# Altium PCB DCDC_4805.PcbDoc
Units mil, origin at the board's own origin, x right, y up, seen from the top; angles counter-clockwise.
Board outline 4000 x 2000 mil, 2 copper layers (Top Layer, Bottom Layer); 39 components, 10 nets, 102 pads, 11 vias.
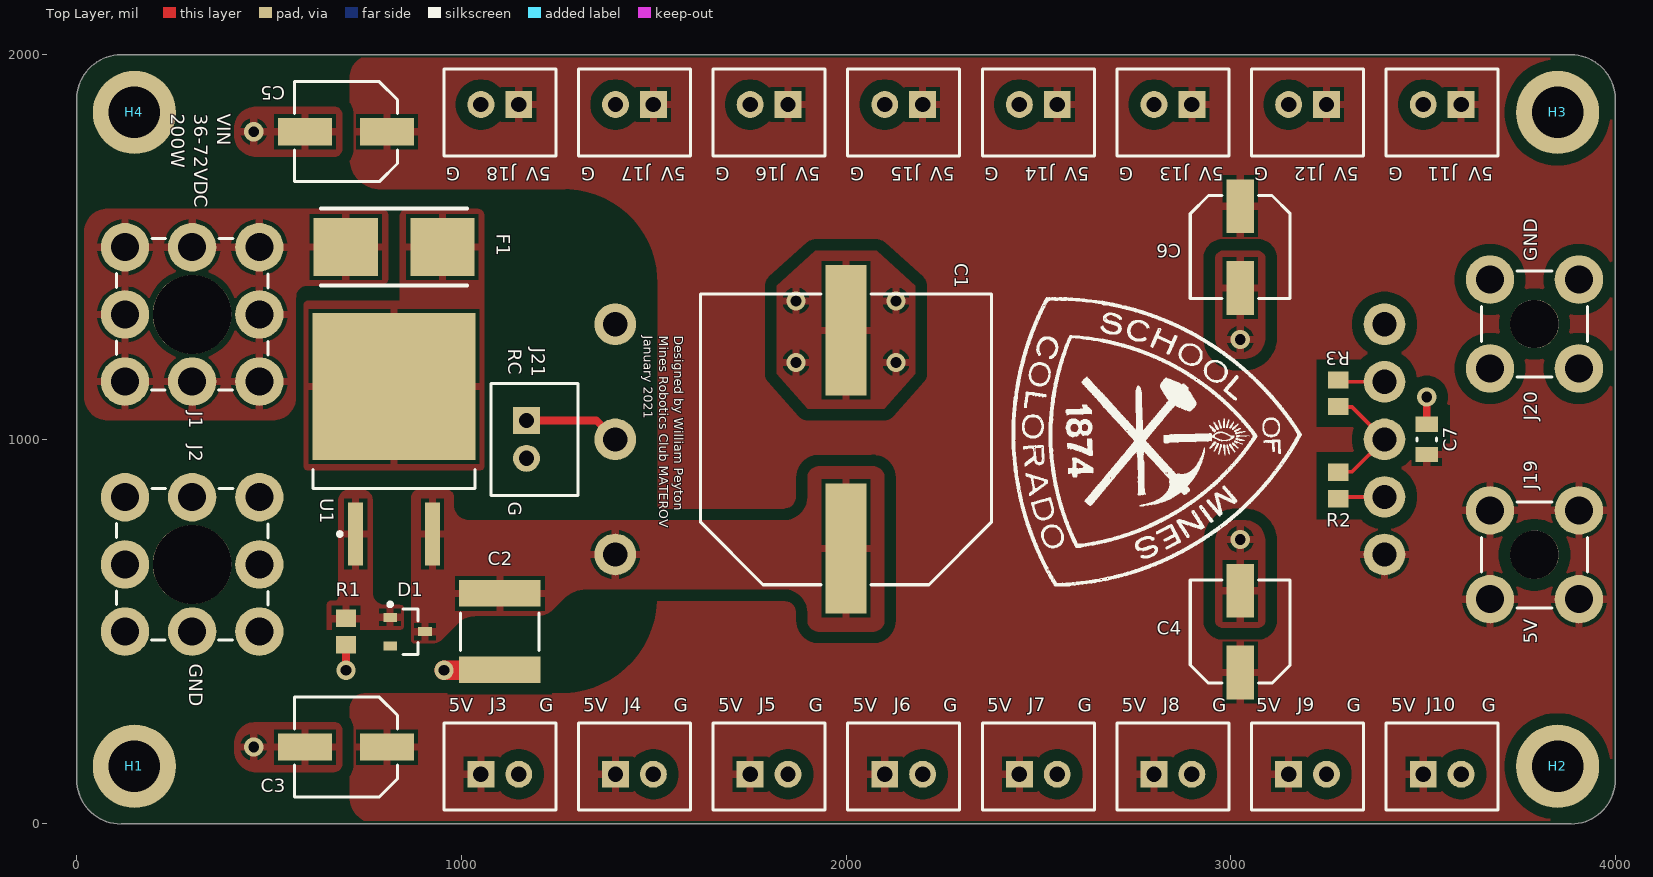
[diagram p0: Top Layer view]
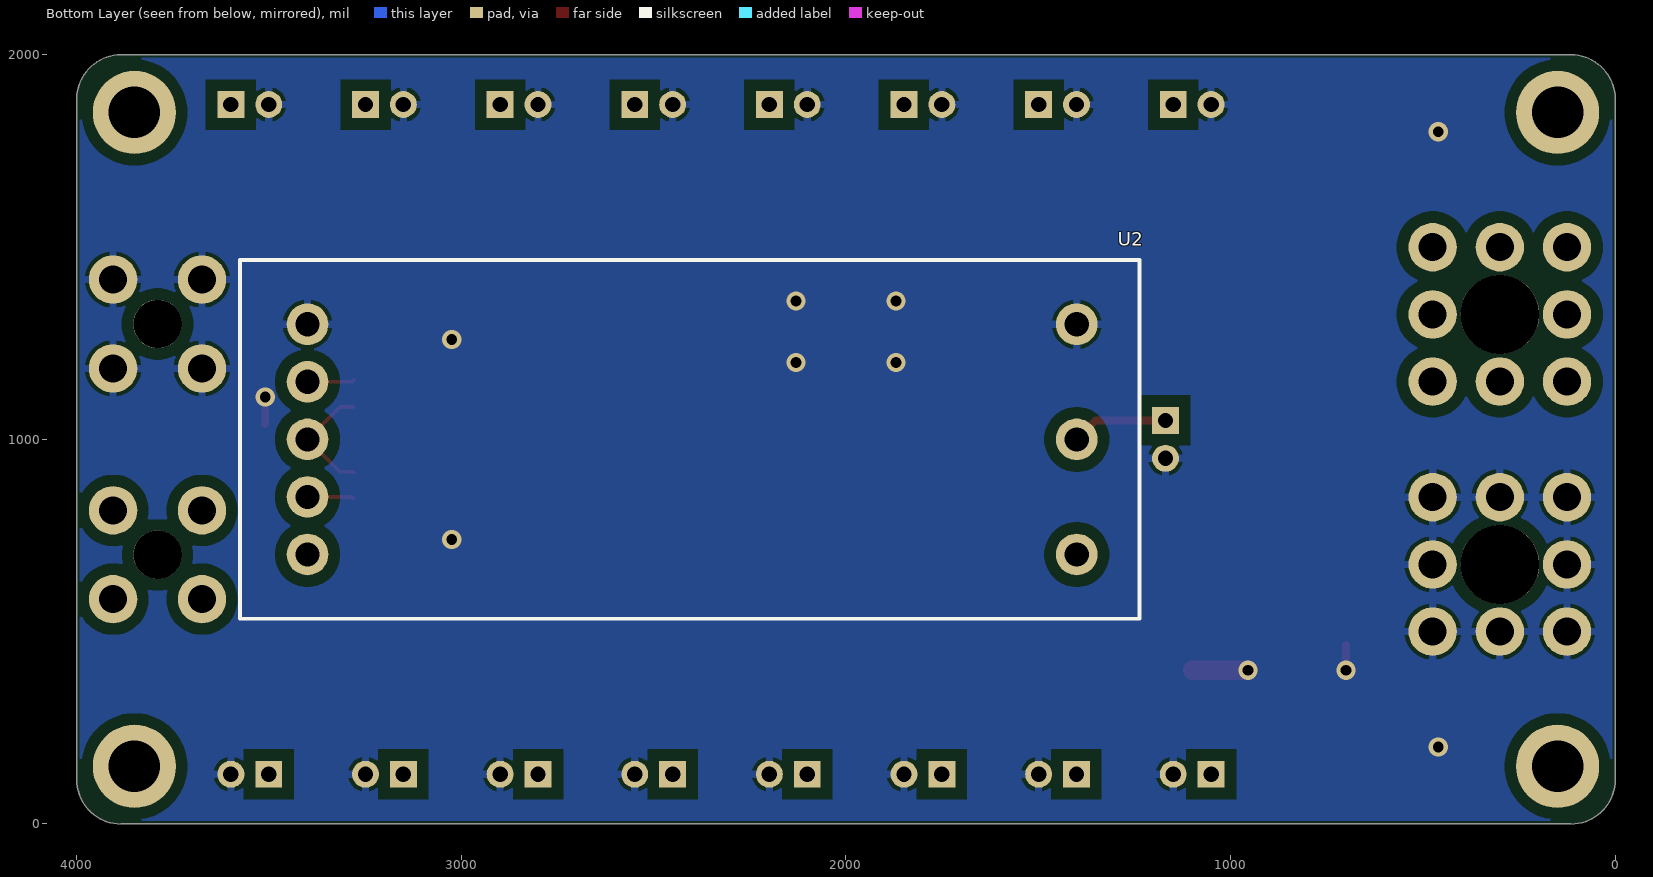
[diagram p1: Bottom Layer view, seen from below]
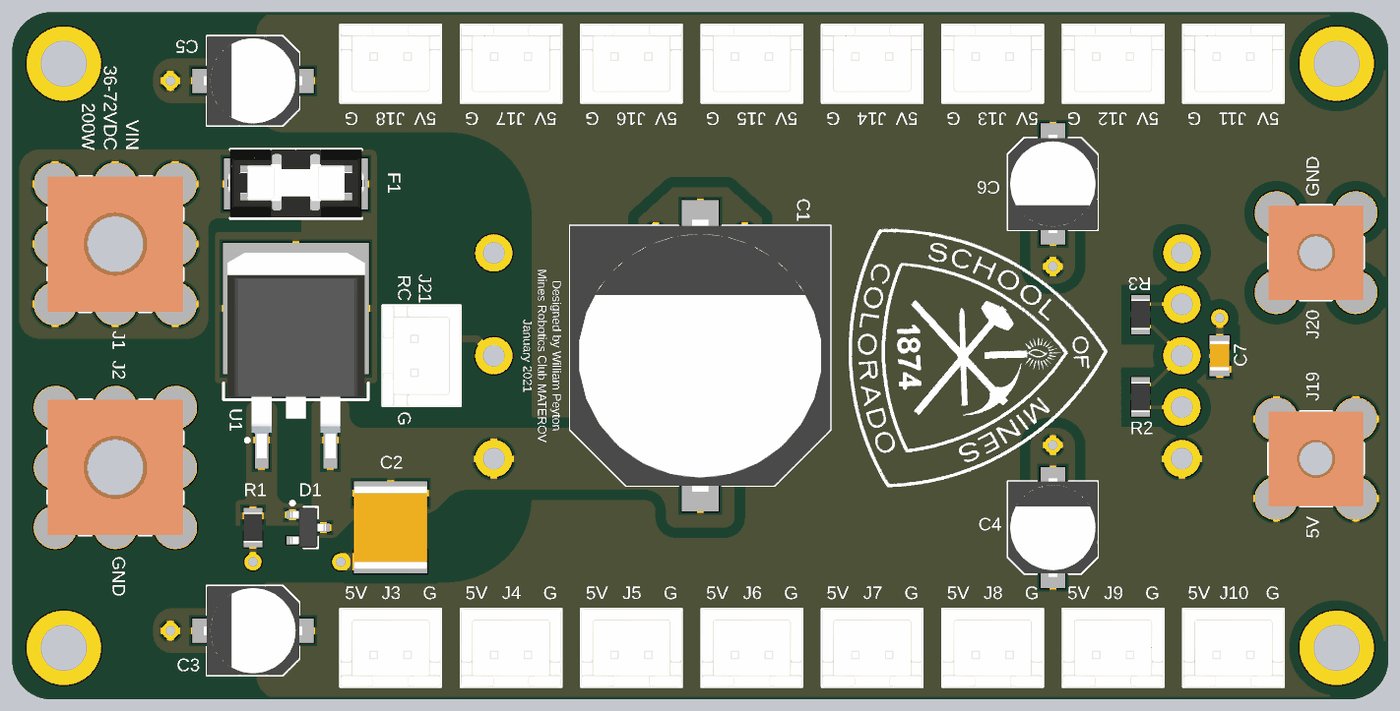
[diagram p2: 3D render of the assembled board from above, using the file's embedded part models]

## Layer stack, top to bottom
Top Solder: solder mask 0.4, Solder Resist, Dk 3.5
Top Layer: signal copper 1.4
Dielectric 1: dielectric 12.6, FR-4, Dk 4.8
Bottom Layer: signal copper 1.4
Bottom Solder: solder mask 0.4, Solder Resist, Dk 3.5

## Board outline
0,115 ccw(c115,115) 115,0 3885,0 ccw(c3885,115) 4000,115 4000,1885 ccw(c3885,1885) 3885,2000 115,2000 ccw(c115,1885) 0,1885

## Design rules (kind name [scope] priority, off if disabled: settings)
BoardOutlineClearance [All] p1: gap=7.87 ignorepadtopadclearanceinfootprint=FALSE except(15.75: Arc-SplitBarrior Arc-SplitContinuation Track-SplitBarrior Track-SplitContinuation SMDPad-SplitBarrior SMDPad-SplitContinuation THPad-SplitBarrior THPad-SplitContinuation Via-SplitBarrior Via-SplitContinuation Fill-SplitBarrior Fill-SplitContinuation Poly-SplitBarrior Poly-SplitContinuation Region-SplitBarrior Region-SplitContinuation Text-SplitBarrior Text-SplitContinuation)
Clearance Clearance_10 [InNamedPolygon('5V_PLANE') Or InNamedPolygon('GND')] p1: gap=30 ignorepadtopadclearanceinfootprint=FALSE
Clearance Clearance_9 [InNamedPolygon('5V_PLANE') Or InNamedPolygon('GND')] p2: gap=10 ignorepadtopadclearanceinfootprint=FALSE except(0: Arc-Hole Track-Hole SMDPad-Hole THPad-Hole Via-Hole Fill-Hole Poly-Hole Region-Hole Text-Hole)
Clearance "Clearance Bottom Layer" [OnLayer('Bottom Layer')] p3: gap=8 ignorepadtopadclearanceinfootprint=TRUE except(10: Arc-Text Track-Text SMDPad-Text THPad-Text Via-Text Fill-Text Poly-Text Region-Text Text-Text)
Clearance "Clearance Top Layer" [OnLayer('Top Layer')] p4: gap=8 ignorepadtopadclearanceinfootprint=TRUE except(10: Arc-Text Track-Text SMDPad-Text THPad-Text Via-Text Fill-Text Poly-Text Region-Text Text-Text)
Clearance Clearance_8 [InNamedPolygon('VIN')] p5: gap=30 ignorepadtopadclearanceinfootprint=FALSE
Clearance Clearance_7 [InNamedPolygon('FET_CLAMP')] p6: gap=15 ignorepadtopadclearanceinfootprint=FALSE
Clearance Clearance_6 [InNamedPolygon('VIN')] p7: gap=15 ignorepadtopadclearanceinfootprint=FALSE
Clearance Clearance_5 [InNamedPolygon('VIN')] p8: gap=10 ignorepadtopadclearanceinfootprint=FALSE except(0: Arc-Hole Track-Hole SMDPad-Hole THPad-Hole Via-Hole Fill-Hole Poly-Hole Region-Hole Text-Hole)
Clearance Clearance_4 [InNamedPolygon('FUSE_IN') Or InNamedPolygon('FUSE_OUT')] p9: gap=15 ignorepadtopadclearanceinfootprint=FALSE
Clearance Clearance_3 [All] p10: gap=25 ignorepadtopadclearanceinfootprint=FALSE
Clearance Clearance_2 [All] p11: gap=30 ignorepadtopadclearanceinfootprint=FALSE
Clearance Clearance_1 [InNamedPolygon('NONET_L-01_P-001')] p12: gap=20 ignorepadtopadclearanceinfootprint=FALSE
Clearance [All] p13: gap=7.87 ignorepadtopadclearanceinfootprint=FALSE except(3.5: Arc-Arc Arc-Track Arc-SMDPad Track-Track Track-SMDPad SMDPad-SMDPad; 5: Arc-Via Track-Via SMDPad-Via THPad-Via Via-Via; 10: Arc-Text Track-Text SMDPad-Text THPad-Text Via-Text Fill-Text Poly-Text Region-Text Text-Text)
HoleSize [All] p1: absolutevalues=TRUE maxlimit=248.03 minlimit=7.87 maxpercent=80.000 minpercent=20.000
MinimumAnnularRing [All] p1: minimumring=3
MinimumSolderMaskSliver [All] p1: minsoldermaskwidth=3.94
PolygonConnect PolygonConnect_1 [All] p1: thpad.connectstyle=Relief thpad.reliefconductorwidth=20 thpad.reliefentries=4 thpad.polygonreliefangle="90 Angle" thpad.airgapwidth=10 smdpad.connectstyle=Relief smdpad.reliefconductorwidth=20 smdpad.reliefentries=4 smdpad.polygonreliefangle="90 Angle" smdpad.airgapwidth=10 via.connectstyle=Direct via.reliefconductorwidth=20 via.reliefentries=4 via.polygonreliefangle="90 Angle" via.airgapwidth=10
PolygonConnect [All] p2: connectstyle=Relief reliefconductorwidth=10 reliefentries=4 polygonreliefangle="90 Angle" airgapwidth=10
RoutingCorners [All] p1: cornerstyle=Round minsetback=100 maxsetback=100
RoutingVias [All] p1: holewidth=19.68 width=39.37 viastyle="Through Hole" minholewidth=7.87 minwidth=17.72 maxholewidth=39.37 maxwidth=78.74
SilkToSilkClearance [All] p1: silktosilkclearance=3.94
SilkToSolderMaskClearance [IsPad] p1: minsilkscreentomaskgap=3.94 clearancetoexposedcopper=TRUE
SolderMaskExpansion [All] p1: expansion=4 istentingtop=FALSE
Width [All] p1: maxlimit=100 minlimit=3.5 preferedwidth=15
25 further rules are at their usual default settings.

## Components (designator, comment, footprint, x,y, rotation, side; value= is the part's Value field where it differs from the comment)
C1 "330uF 100V" EEV-FK2A331M 2000,1000 r90 top
C2 "15uF 100V" "C2220M Generic" 1100,500 r90 top
C3 "100uF 10V" 865080243007 700,200 r180 top
C4 "100uF 10V" 865080243007 3025,500 r90 top
C5 "100uF 10V" 865080243007 700,1800 r180 top
C6 "100uF 10V" 865080243007 3025,1500 r270 top
C7 "22uF 10V" 885012107011 3510,1000 r90 top
D1 "12V 250mW" BZX84-C12,235 860,500 r0 top
F1 "125VDC 5A" 0154005.DRL 825,1500 r0 top
H1 "M3" M3_MOUNTING_HOLE#1 1015,55 r0 top
H2 "M3" M3_MOUNTING_HOLE#2 3785,90 r0 top
H3 "M3" M3_MOUNTING_HOLE#3 3750,1850 r0 top
H4 "M3" M3_MOUNTING_HOLE#4 970,1850 r0 top
J1 "M5x3.5mm" 74655095 300,1325 r0 top
J2 "M5x3.5mm" 74655095 300,675 r0 top
J3 "JST-XH 2POS VERT" FP-B2B-XH-A_LF_SN-MFG 1100,150 r0 top
J4 "JST-XH 2POS VERT" FP-B2B-XH-A_LF_SN-MFG 1450,150 r0 top
J5 "JST-XH 2POS VERT" FP-B2B-XH-A_LF_SN-MFG 1800,150 r0 top
J6 "JST-XH 2POS VERT" FP-B2B-XH-A_LF_SN-MFG 2150,150 r0 top
J7 "JST-XH 2POS VERT" FP-B2B-XH-A_LF_SN-MFG 2500,150 r0 top
J8 "JST-XH 2POS VERT" FP-B2B-XH-A_LF_SN-MFG 2850,150 r0 top
J9 "JST-XH 2POS VERT" FP-B2B-XH-A_LF_SN-MFG 3200,150 r0 top
J10 "JST-XH 2POS VERT" FP-B2B-XH-A_LF_SN-MFG 3550,150 r0 top
J11 "JST-XH 2POS VERT" FP-B2B-XH-A_LF_SN-MFG 3550,1850 r180 top
J12 "JST-XH 2POS VERT" FP-B2B-XH-A_LF_SN-MFG 3200,1850 r180 top
J13 "JST-XH 2POS VERT" FP-B2B-XH-A_LF_SN-MFG 2850,1850 r180 top
J14 "JST-XH 2POS VERT" FP-B2B-XH-A_LF_SN-MFG 2500,1850 r180 top
J15 "JST-XH 2POS VERT" FP-B2B-XH-A_LF_SN-MFG 2150,1850 r180 top
J16 "JST-XH 2POS VERT" FP-B2B-XH-A_LF_SN-MFG 1800,1850 r180 top
J17 "JST-XH 2POS VERT" FP-B2B-XH-A_LF_SN-MFG 1450,1850 r180 top
J18 "JST-XH 2POS VERT" FP-B2B-XH-A_LF_SN-MFG 1100,1850 r180 top
J19 "M3x2.5mm" 74650073 3790,700 r0 top
J20 "M3x2.5mm" 74650073 3790,1300 r0 top
J21 "JST-XH 2POS VERT" FP-B2B-XH-A_LF_SN-MFG 1190,1000 r270 top
R1 "100kΩ" RMCF0805 700,500 r90 top
R2 "100kΩ" RMCF0805 3280,880 r270 top
R3 "100kΩ" RMCF0805 3280,1120 r90 top
U1 "P-CH FET 100V" IRF9530NSTRLPBF 825,1000 r90 top
U2 "48V/5V 200W" PKB4211DPI 2400,1000 r0 bottom

## Footprints (in the part's own frame and the unit in brackets; to place one, negate y for a bottom-side part, rotate by r counter-clockwise, add the part's x,y. Pads: shape width x height; smd on the part's side, far side on the other; paste and mask are expansions set on the pad)
0154005.DRL [mm] "Littelfuse FUSE BRD MNT 5A 125VAC/VDC 2SMD"
  rect 4.24x3.81 smd: 1(-3.19,0) 2(3.19,0)
  silkscreen extent -4.83,-2.54 4.83,2.54, body extent -5.07,-2.46 5.07,2.54, height 3.68
74650073 [mm] "REDCUBE THR with internal thread, M3x2.5mm, through"
  round 3.2 hole 1.85: 1(-2.935,-2.935) 1(-2.935,2.935) 1(2.935,-2.935) 1(2.935,2.935)
  round 3.2 hole 3.2 unplated: MH1(0,0)
  silkscreen extent -3.5,-3.5 3.5,3.5, body extent -3.5,-3.5 3.5,3.5, height 3
74655095 [mm] "REDCUBE THR with internal thread, M5x3.5mm, through"
  round 3.2 hole 1.85: 1(-4.435,-4.435) 1(-4.435,0) 1(-4.435,4.435) 1(0,-4.435) 1(0,4.435) 1(4.435,-4.435) 1(4.435,0) 1(4.435,4.435)
  round 5.2 hole 5.2 unplated: MH1(0,0)
  silkscreen extent -5,-5 5,5, body extent -5,-5 5,5, height 4
865080243007 [mm] "Wurth CAP ALUM POLY 100UF 20% 10V SMD"
  rect 3.55x1.8 smd: 1(-2.7,0) 2(2.7,0)
  silkscreen extent -3.4,-3.3 3.4,3.3, body extent -3.65,-3.3 3.65,3.3, height 5.5
885012107011 [mm] "Wurth CAP CER 22UF 10V X5R 0805"
  rect 1x1.5 smd: 1(-1,0) 2(1,0)
  silkscreen extent -0.1,-0.65 0.1,0.65, body extent -1.1,-0.72 1.1,0.72, height 1.45
BZX84-C12,235 [mm] "Nexperia DIODE ZENER 12V 250MW TO236AB"
  rect 0.9x0.6 smd: 1(-1.15,0.95) 2(-1.15,-0.95) 3(1.15,0)
  silkscreen extent -1.27,-1.5 0.7,1.92, body extent -1.3,-1.5 1.3,1.5, height 1.1
"C2220M Generic" [mm] "TDK Chip Ceramic Cap 2220M Generic"
  rect 1.75x5.4 smd: 1(-2.525,0) 2(2.525,0)
  silkscreen extent -1.25,-2.6 1.25,2.6, body extent -3.05,-2.7 3.05,2.7, height 2.8
EEV-FK2A331M [mm] "Panasonic CAP ALUM 330UF 20% 100V SMD"
  rect 8.6x2.7 smd: 1(-7.2,0) 2(7.2,0)
  silkscreen extent -9.6,-9.6 9.6,9.6, body extent -10.05,-9.6 10.05,9.6, height 17
FP-B2B-XH-A_LF_SN-MFG [mil]
  rect 70x70 hole 40 paste-39370.1 mask+0: 1(-49.21,-20.67)
  round 70 hole 40 paste-39370.1 mask+0: 2(49.21,-20.67)
  silkscreen extent -146,-113 146,113, body extent -150,-117 150,117, height 10
IRF9530NSTRLPBF [mm] "Infineon MOSFET P-CH 100V 14A D2PAK"
  rect 4.15x1 smd: 1(-6.25,2.54) 3(-6.25,-2.54)
  rect 9.7x10.75 smd: 4(3.5,0)
  silkscreen extent -6.37,-5.33 -2,5.35, body extent -7.62,-5.08 7.62,5.08, height 4.83
M3_MOUNTING_HOLE#1 [mm] "MECHANICAL M3 MOUNTING HOLE"
  round 5.5 hole 3.4: 1(-21.971,2.413)
M3_MOUNTING_HOLE#2 [mm] "MECHANICAL M3 MOUNTING HOLE"
  round 5.5 hole 3.4: 1(1.651,1.524)
M3_MOUNTING_HOLE#3 [mm] "MECHANICAL M3 MOUNTING HOLE"
  round 5.5 hole 3.4: 1(2.54,0)
M3_MOUNTING_HOLE#4 [mm] "MECHANICAL M3 MOUNTING HOLE"
  round 5.5 hole 3.4: 1(-20.828,0)
PKB4211DPI [mm] "Flex Power DC DC CONVERTER 5V 200W"
  round 2.75 hole 1.6: 1(-25.4,7.6) 2(-25.4,0) 3(-25.4,-7.6) 4(25.4,-7.6) 5(25.4,-3.8) 6(25.4,0) 7(25.4,3.8) 8(25.4,7.6)
  silkscreen extent -29.55,-11.85 29.85,11.85, body extent -29.55,-11.85 29.85,11.85, height 13.2
RMCF0805 [mm] "Stackpole RMCF0805 Family"
  rect 1.15x1.35 smd: 1(-0.875,0) 2(0.875,0)
  body extent -1.1,-0.67 1.1,0.67, height 0.65

## Part data
C1: library part EEV-FK2A331M, "Panasonic CAP ALUM 330UF 20% 100V SMD", Manufacturer="Panasonic Electronic Components", ComponentLink1Description=DigiKey, ComponentLink1URL=https://www.digikey.com/en/products/detail/panasonic-electronic-components/EEV-FK2A331M/408248, Part Number=EEV-FK2A331M
C2: library part C5750X7S2A156M250KB, "TDK CAP CER 15UF 100V X7S 2220", Manufacturer="TDK Corporation", ComponentLink1Description=DigiKey, ComponentLink1URL=https://www.digikey.com/en/products/detail/tdk-corporation/C5750X7S2A156M250KB/2443522, Part Number=C5750X7S2A156M250KB
C3 C4 C5 C6: library part 865080243007, "Wurth CAP ALUM POLY 100UF 20% 10V SMD", Manufacturer="Würth Elektronik", ComponentLink1Description=DigiKey, ComponentLink1URL=https://www.digikey.com/en/products/detail/w%C3%BCrth-elektronik/865080243007/5728085, Part Number=865080243007
C7: library part 885012107011, "Wurth CAP CER 22UF 10V X5R 0805", Manufacturer="Würth Elektronik", ComponentLink1Description=DigiKey, ComponentLink1URL=https://www.digikey.com/en/products/detail/w%C3%BCrth-elektronik/885012107011/5453476, Part Number=885012107011
D1: library part BZX84-C12,235, "Nexperia DIODE ZENER 12V 250MW TO236AB", Manufacturer=Nexperia, ComponentLink1Description=DigiKey, ComponentLink1URL=https://www.digikey.com/en/products/detail/nexperia-usa-inc/BZX84-C12-235/5221767, Part Number=BZX84-C12,235
F1: library part 0154005.DRL, "Littelfuse FUSE BRD MNT 5A 125VAC/VDC 2SMD", Manufacturer=Littelfuse, Part Number=0456030.ER0154005.DRL, ComponentLink1Description=DigiKey, ComponentLink1URL=https://www.digikey.com/en/products/detail/littelfuse-inc/0154005-DRL/2520370
H1 H2 H3 H4: library part M3_Mounting_Hole, "MECHANICAL M3 Mounting Hole"
J1 J2: library part 74655095R, "Wurth WP-THRBU REDCUBE THR internal through-hole thread, 10x10mm, M5x3.5mm, 8 pins, 85A", Manufacturer="Wurth Elektronik", Operating Temperature="-55 to +150degC", Rated Current=85A, ComponentLink1Description=Manufacturer, ComponentLink1URL=http://www.we-online.de, ComponentLink2Description=Datasheet, ComponentLink2URL=https://katalog.we-online.com/em/datasheet/74655095R.pdf, Height=4mm, Material=Brass, Mounting Technology=SMT, Packaging="Tape and Reel", Part Number=74655095R, Pin Number=8, Published Date="September 2019", Publisher="Wurth Elektronik", Size=10x10mm, Surface=Tin, Thread=M5, Thread Length=3.5mm
J3 J4 J5 J6 J7 J8 J9 J10 J11 J12 J13 J14 J15 J16 J17 J18 J21: library part B2B-XH-A(LF)(SN), "JST XH CONN HEADER VERT 2POS 2.5MM", Manufacturer=JST, ComponentLink2Description=Datasheet, ComponentLink2URL=http://www.jst-mfg.com/product/pdf/eng/eXH.pdf?5d9b3ba19c79b, Part Number=B2B-XH-A(LF)(SN)
J19 J20: library part 74650073R, "Wurth WP-THRBU REDCUBE THR internal through-hole thread, 7x7mm, M3x2.5mm, 4 pins, 50A", Manufacturer="Wurth Elektronik", Operating Temperature="-55 to +150degC", Rated Current=50A, ComponentLink1Description=Manufacturer, ComponentLink1URL=http://www.we-online.de, ComponentLink2Description=Datasheet, ComponentLink2URL=https://katalog.we-online.com/em/datasheet/74650073R.pdf, Height=3mm, Material=Brass, Mounting Technology=SMT, Packaging="Tape and Reel", Part Number=74650073R, Pin Number=4, Published Date="September 2019", Publisher="Wurth Elektronik", Size=7x7mm, Surface=Tin, Thread=M3, Thread Length=2.5mm
R1 R2 R3: library part RMCF0805FT100K, "Stackpole RES 100K OHM 1% 1/8W 0805", Manufacturer="Stackpole Electronics Inc", Part Number=RMCF0805FT100K
U1: library part IRF9530NSTRLPBF, "Infineon MOSFET P-CH 100V 14A D2PAK", Manufacturer="Infineon Technologies", ComponentLink1Description=DigiKey, ComponentLink1URL=https://www.digikey.com/en/products/detail/infineon-technologies/IRF4905STRLPBF/2440973, Part Number=IRF9530NSTRLPBF
U2: library part PKB4211DPI, "Flex Power DC DC CONVERTER 5V 200W", Manufacturer="Flex Power Modules", ComponentLink1Description=DigiKey, ComponentLink1URL=https://www.digikey.com/en/products/detail/flex-power-modules/PKB4211DPI/10287630, Part Number=PKB4211DPI

## Via types
v1: diameter 50, hole 28, Top Layer to Bottom Layer, 11 vias

## Nets (pads, with @x,y where several pads share a name; then routed paths per layer and width w, separated by ;. In a path a pad name is that pad's centre, name@x,y a point inside that pad or via, vN(x,y) a via of type N, cw(c..) or ccw(c..) an arc to the next point about the centre after c; other vN are vias at no path point)
5V: C3.1 C4.1 C5.1 C6.1 C7.1 J3.1 J4.1 J5.1 J6.1 J7.1 J8.1 J9.1 J10.1 J11.1 J12.1 J13.1 J14.1 J15.1 J16.1 J17.1 J18.1 J19.1 U2.8
48V: F1.1 J1.1
GND: C1.2 C2.1 C3.2 C4.2 C5.2 C6.2 C7.2 J2.1 J3.2 J4.2 J5.2 J6.2 J7.2 J8.2 J9.2 J10.2 J11.2 J12.2 J13.2 J14.2 J15.2 J16.2 J17.2 J18.2 J20.1 J21.2 R1.1 U2.3 U2.4 | length 281.4
  Top Layer w10: C2.1@1099.41,400 C2.1
  Top Layer w20: v1(700,400) R1.1 ; C7.2 v1(3510,1110)
  Top Layer w50: v1(955,400) C2.1@1099.41,400
  other v1: 460,200 3025,740 1870,1200 2130,1200 3025,1260 1870,1360 2130,1360 460,1800
NetD1_1: D1.1 R1.2 U1.1
NetF1_2: F1.2 U1.4
NetR2_1: R2.1 R3.1 U2.6 | length 310.9
  Top Layer w10: R2.1 3281.27,915.72 3315.72,915.72 U2.6 3315.72,1084.28 3281.27,1084.28 R3.1
NetR2_2: R2.2 U2.7 | length 122
  Top Layer w10: R2.2 3284.84,850.39 U2.7
NetR3_2: R3.2 U2.5 | length 122
  Top Layer w10: R3.2 3284.45,1150 3399.61,1150 U2.5
RC: J21.1 U2.2 | length 251.1
  Top Layer w20: J21.1 1350.79,1049.21 U2.2
VIN: C1.1 C2.2 D1.3 U1.3 U2.1
pads on no net: D1.2 H1.1 H2.1 H3.1 H4.1 J1.MH1 J2.MH1 J19.MH1 J20.MH1

## Polygon pours and split planes (outlines as drawn)
VIN on Top Layer "VIN" (solid, pour order 9): 1083.57,540 1195.86,540 ccw(c1195.86,598.28) 1237.07,557.07 1265.86,585.86 cw(c1324.14,527.58) 1324.14,610 1840,610 cw(c1840,550) 1900,550 1900,530 ccw(c1930,530) 1930,500 2070,500 ccw(c2070,530) 2100,530 2100,900 ccw(c2070,900) 2070,930 1930,930 ccw(c1930,900) 1900,900 1900,850 cw(c1840,850) 1840,790 1300,790 1091,790 1020,790 cw(c1020,830) 980,830 980,850 ccw(c960,850) 960,870 890,870 ccw(c890,850) 870,850 870,475 875,470 927.93,470 ccw(c927.93,499.14) 948.54,478.54 992.93,522.93 cw(c1034.14,481.72) 1034.14,540
NetD1_1 on Top Layer "FET_CLAMP" (solid, pour order 8): 850,515 850,560 ccw(c840,560) 840,570 800,570 cw(c800,600) 770,600 770,840 ccw(c740,840) 740,870 710,870 ccw(c710,840) 680,840 680,590 cw(c670,590) 670,580 660,580 ccw(c660,570) 650,570 650,505 840,505 ccw(c840,515)
NetF1_2 on Top Layer "FUSE_OUT" (solid, pour order 6): 860,1600 1040,1600 cw(c1040,1580) 1060,1580 1060,930 cw(c1050,930) 1050,920 600,920 cw(c600,930) 590,930 590,1350 cw(c600,1350) 600,1360 840,1360 840,1580 cw(c860,1580)
5V on Top Layer "5V_PLANE" (solid, pour order 13): 710,70 710,300 cw(c750,300) 750,340 1260,340 ccw(c1260,590) 1510,590 1510,1410 ccw(c1270,1410) 1270,1650 790,1650 cw(c790,1730) 710,1730 710,1940 cw(c770,1940) 770,2000 3885.28,2000 cw(c3885.28,1885.28) 4000,1885.28 4000,117.42 cw(c3882.59,117.41) 3882.58,0 780,0 cw(c780,70)
48V on Top Layer "FUSE_IN" (solid, pour order 5): 80,1600 790,1600 cw(c790,1580) 810,1580 810,1420 cw(c790,1420) 790,1400 600,1400 ccw(c600,1370) 570,1370 570,1110 cw(c510,1110) 510,1050 80,1050 cw(c80,1110) 20,1110 20,1540 cw(c80,1540)
GND on Top Layer "GND5" (solid, pour order 4): 2080,1490 2180,1400 2180,1170 2100,1080 1900,1080 1820,1170 1820,1400 1920,1490
GND on Top Layer "GND4" (solid, pour order 3): 690,1845 690,1755 cw(c670,1755) 670,1735 465,1735 cw(c465,1790) 410,1790 410,1810 cw(c465,1810) 465,1865 670,1865 cw(c670,1845)
GND on Top Layer "GND2" (solid, pour order 2): 690,245 690,155 cw(c670,155) 670,135 465,135 cw(c465,190) 410,190 410,210 cw(c465,210) 465,265 670,265 cw(c670,245)
GND on Top Layer "GND1" (solid, pour order 1): 3070,510 2980,510 cw(c2980,530) 2960,530 2960,735 cw(c3015,735) 3015,790 3035,790 cw(c3035,735) 3090,735 3090,530 cw(c3070,530)
GND on Top Layer "GND3" (solid, pour order 0): 2980,1490 3070,1490 cw(c3070,1470) 3090,1470 3090,1265 cw(c3035,1265) 3035,1210 3015,1210 cw(c3015,1265) 2960,1265 2960,1470 cw(c2980,1470)
GND on Bottom Layer "GND" (solid, pour order 12): 0,104.64 0,1882.58 cw(c117.42,1882.58) 117.42,2000 3885.28,2000 cw(c3885.28,1885.28) 4000,1885.28 4000,117.42 cw(c3882.58,117.42) 3882.58,0 104.64,0 cw(c104.64,104.64)

## Silkscreen, mask and mechanical layers (free items; w line width, h text height)
Top Overlay:
  drawing of 49 lines, arcs and shapes, not listed
  text "VIN / 36-72VDC / 200W" at 233.69,1846.02 h60 r270
  text "5V           G" at 1232.77,1719.22 h60 r180
  text "5V           G" at 1582.77,1719.22 h60 r180
  text "5V           G" at 1932.77,1719.22 h60 r180
  text "5V           G" at 2282.77,1719.22 h60 r180
  text "5V           G" at 2632.77,1719.22 h60 r180
  text "5V           G" at 2982.77,1719.22 h60 r180
  text "5V           G" at 3332.77,1719.22 h60 r180
  text "5V           G" at 3682.77,1719.22 h60 r180
  text "GND" at 3809.22,1463.28 h60 r90
  text "Designed by William Peyton / Mines Robotics Club MATEROV / January 2021" at 1466.02,1270 h40 r270
  text "RC" at 1110.78,1235.57 h60 r270
  text "G" at 1110.78,837.74 h60 r270
  text "5V" at 3808.89,468.55 h60 r90
  text "GND" at 280.78,416.72 h60 r270
  text "5V           G" at 967.23,280.78 h60
  text "5V           G" at 1317.23,280.78 h60
  text "5V           G" at 1667.23,280.78 h60
  text "5V           G" at 2017.23,280.78 h60
  text "5V           G" at 2367.23,280.78 h60
  text "5V           G" at 2717.23,280.78 h60
  text "5V           G" at 3067.23,280.78 h60
  text "5V           G" at 3417.23,280.78 h60
Mechanical 1:
  the board outline again, w10